# Altium PCB steve.PcbDoc (part 3 of 3)
Units mm, origin at the board's own origin, x right, y up, seen from the top; angles counter-clockwise.
Board outline 168.82 x 167.1 mm, 4 copper layers (Top Layer, Mid-Layer 1, Mid-Layer 2, Bottom Layer); 272 components, 254 nets, 1057 pads, 241 vias.
Unrouted connection lines stored in the file: 229.
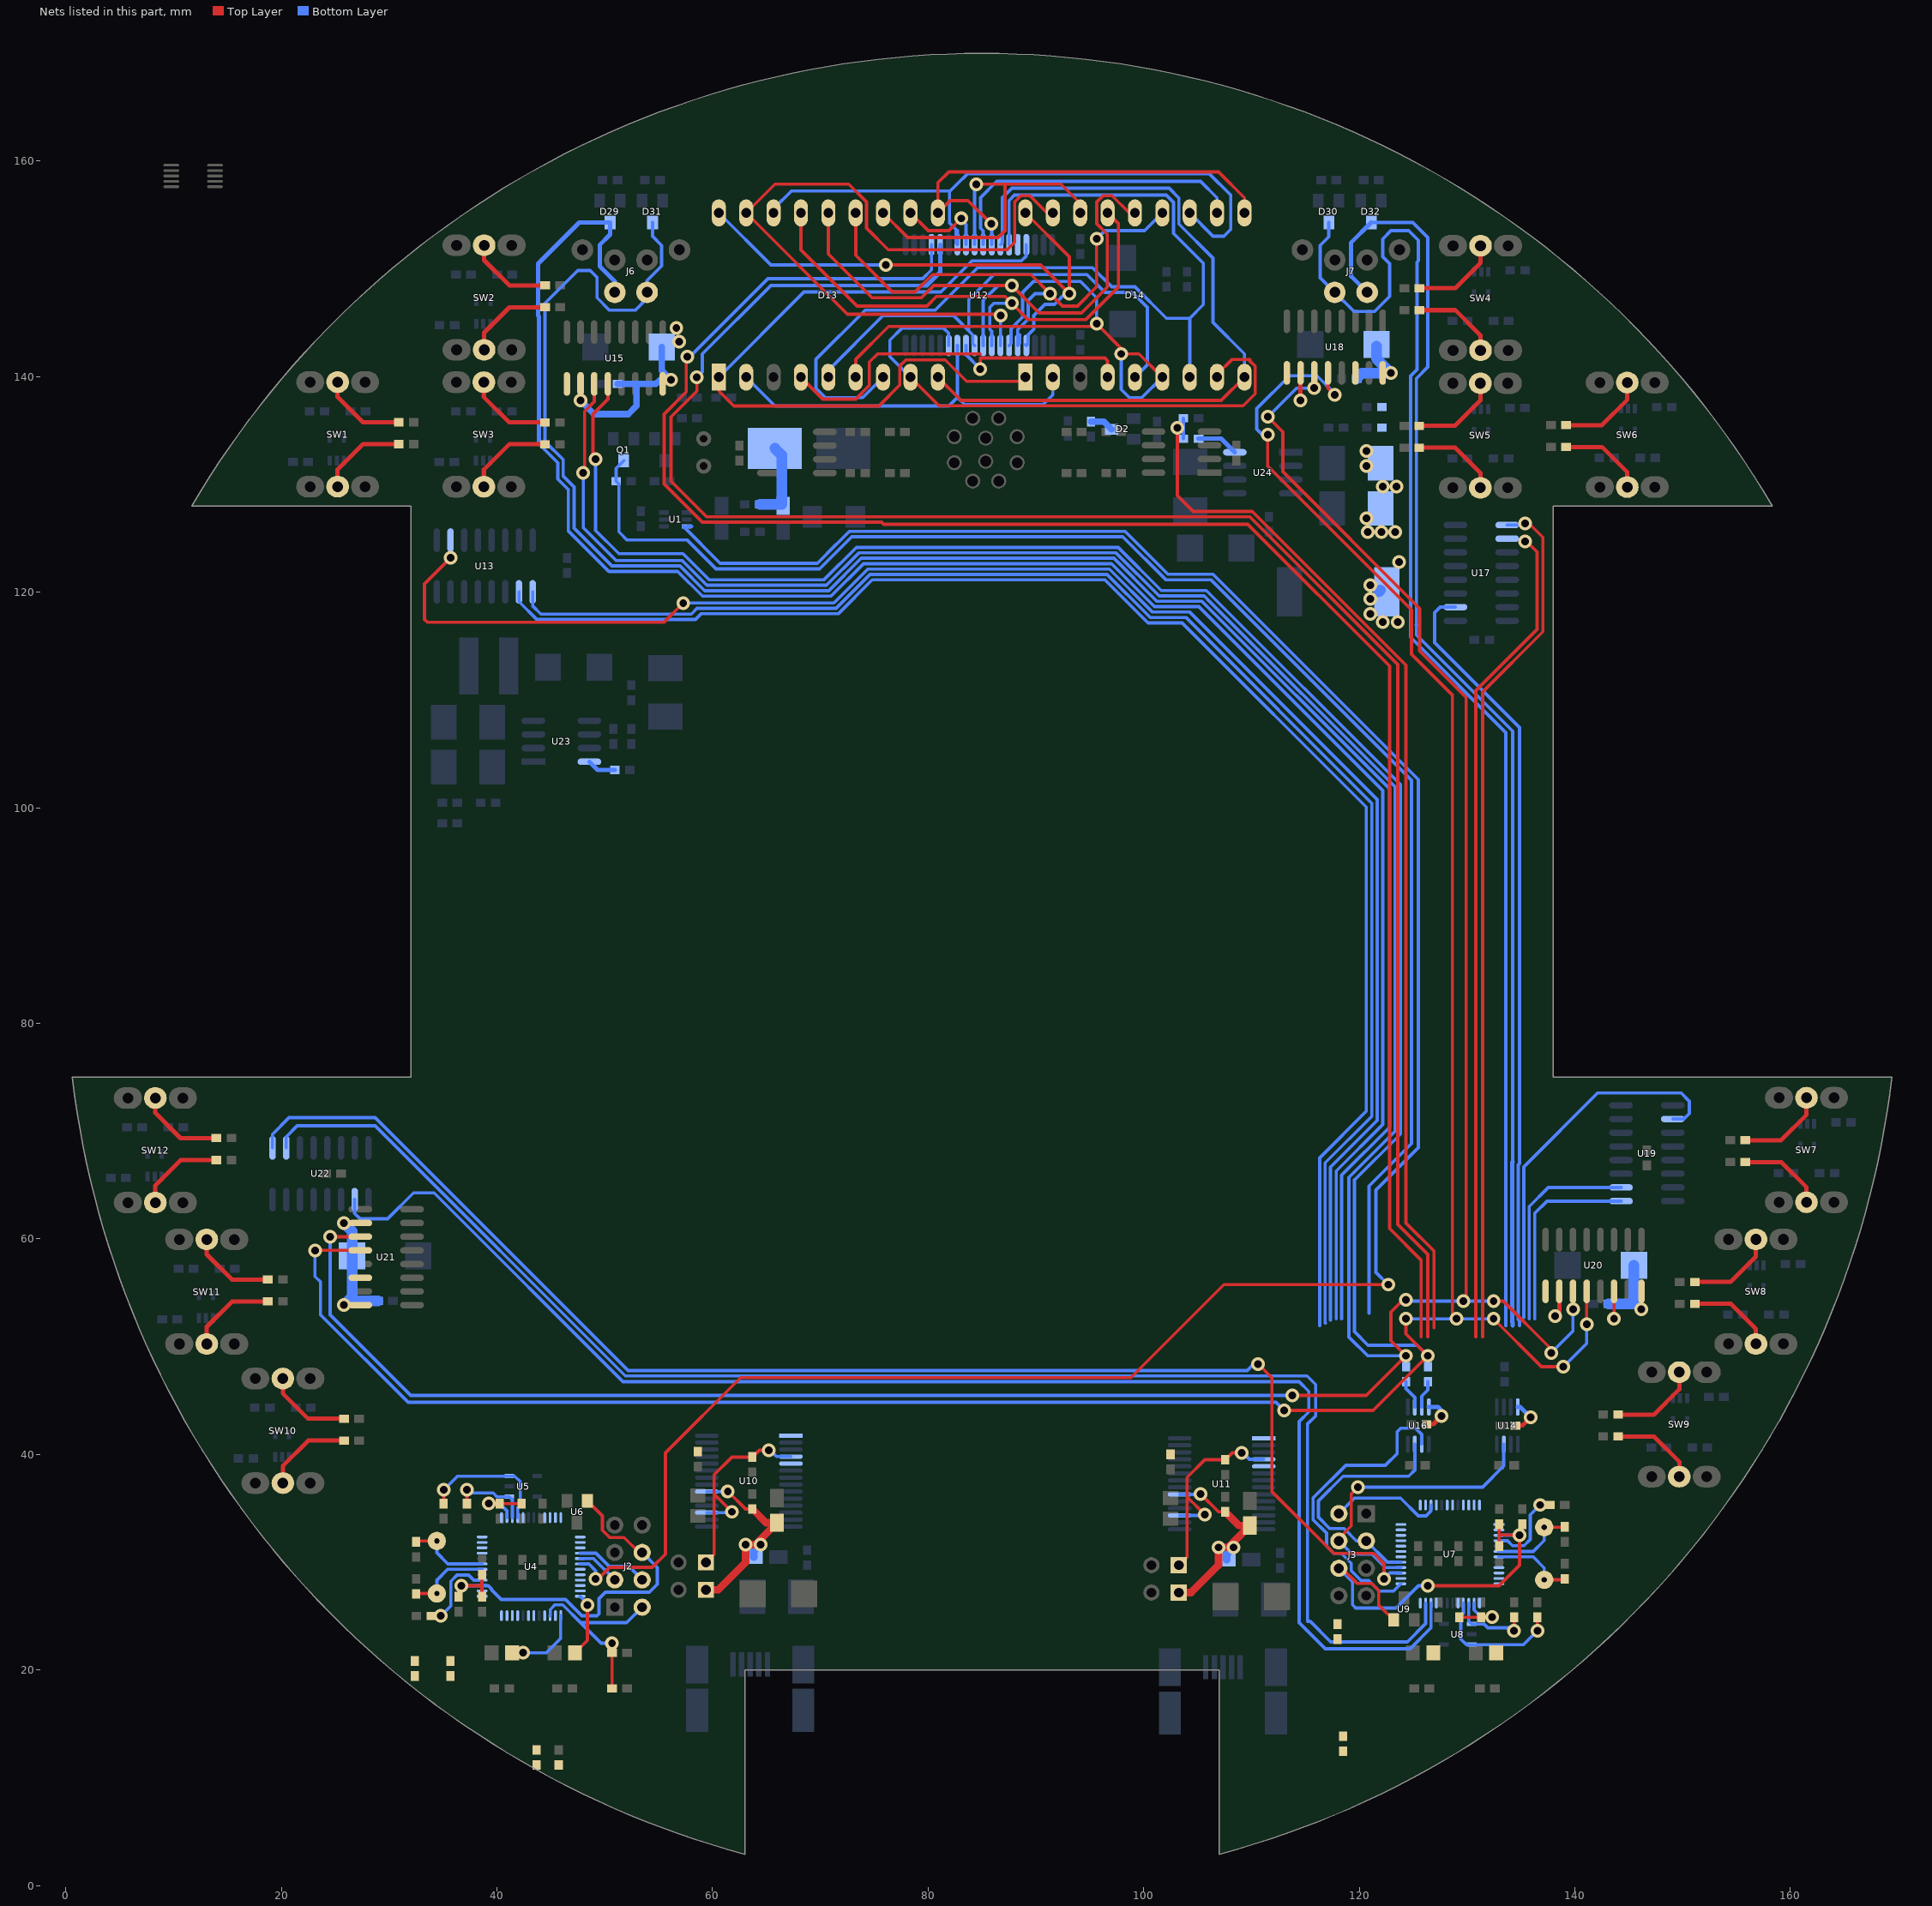
[diagram p5: the nets of this part, all layers, seen from the top]

## Via types
v1: diameter 1.27, hole 0.711, Top Layer to Bottom Layer, 241 vias

## Nets (pads, with @x,y where several pads share a name; then routed paths per layer and width w, separated by ;. In a path a pad name is that pad's centre, name@x,y a point inside that pad or via, vN(x,y) a via of type N, cw(c..) or ccw(c..) an arc to the next point about the centre after c; other vN are vias at no path point) (continued)
NetR48_1: R48.1 U15.12 U18.12 U20.12 U21.12 | length 412.6
  Top Layer w0.3: v1(23.114,58.928) U21.12@27.318,58.928 ; v1(49.149,132.334) 48.895,132.588 48.895,136.525 50.292,137.922 U15.12@50.292,139.332 ; v1(111.506,134.62) 111.506,131.699 124.841,118.364 124.841,114.238 128.651,110.428 128.651,52.959 v1(129.032,52.578) ; v1(113.03,44.069) 121.285,44.069 v1(126.365,49.149) 124.333,51.181 v1(124.333,52.578) ; U18.12@117.094,140.348 117.094,138.938 v1(117.729,138.303) ; v1(132.461,52.578) 136.906,48.133 v1@138.811,48.133 ; v1(141.097,52.07) U20.12@141.097,55.131
  Bottom Layer w0.3: v1(23.114,58.928) 23.114,56.515 23.622,56.007 23.622,52.959 31.75,44.831 112.268,44.831 v1(113.03,44.069) ; v1@49.149,132.08 49.149,125.73 51.308,123.571 57.247,123.571 59.66,121.158 70.354,121.158 73.345,124.149 97.645,124.149 101.636,120.158 105.813,120.158 123.825,102.146 123.825,69.723 119.598,65.496 119.543,65.496 119.543,51.399 120.808,50.134 125.38,50.134 v1(126.365,49.149) ; v1(111.506,134.62) 110.998,134.62 110.49,135.128 110.49,137.033 113.538,140.081 116.074,140.081 117.729,138.426 v1(117.729,138.303) ; v1(124.333,52.578) 127.127,52.578 v1(129.032,52.578) v1@132.334,52.578 ; v1(138.938,48.133) 141.097,50.292 v1(141.097,52.07)
NetR48_2: R48.2 U16.7 | length 2.6
  Bottom Layer w0.3: U16.7@125.801,44.397 125.801,45.41 126.365,45.974 R48.2@126.365,46.736
NetR49_1: R49.1 U15.11 U18.11 U20.11 U21.11 | length 400.1
  Top Layer w0.3: v1(24.511,60.198) U21.11@27.318,60.198 ; v1@48.006,131.318 48.133,131.445 48.133,136.779 49.022,137.668 U15.11@49.022,139.332 ; v1(111.506,136.271) 112.903,134.874 112.903,131.191 125.603,118.491 125.603,114.554 129.921,110.236 129.921,54.483 v1(129.667,54.229) ; v1(113.792,45.466) 120.65,45.466 v1(124.333,49.149) 122.936,50.546 122.936,53.213 124.079,54.356 v1(124.333,54.356) ; v1(132.461,54.229) 133.35,54.229 137.668,49.911 v1@137.668,49.53 ; v1(139.827,53.467) U20.11@139.827,55.131
  Bottom Layer w0.3: v1(24.511,60.198) 24.511,52.959 32.004,45.466 v1(113.792,45.466) ; v1(48.006,131.064) 48.006,125.984 51.054,122.936 57.175,122.936 59.461,120.65 70.565,120.65 73.563,123.649 97.438,123.649 101.429,119.658 105.606,119.658 106.155,119.109 ; 107.044,118.22 106.155,119.109 ; v1(111.506,136.271) 114.173,138.938 v1(115.824,138.938) ; v1@124.333,49.53 v1(124.333,49.149) 120.777,49.149 119.043,50.883 119.043,65.703 123.317,69.977 123.317,101.947 106.155,119.109 ; v1(124.333,54.356) 124.46,54.229 v1(129.667,54.229) v1(132.461,54.229) ; v1(137.795,49.403) 139.827,51.435 v1(139.827,53.467)
NetR49_2: R49.2 U16.6 | length 2.7
  Bottom Layer w0.3: R49.2@124.333,46.736 124.333,46.101 125.151,45.283 U16.6@125.151,44.397
NetR53_2: R53.2 SW1.6 | length 8.2
  Top Layer w0.4: SW1.6@25.215,129.793 25.214,131.386 27.566,133.738 R53.2@30.884,133.738
NetR54_2: R54.2 SW1.5 | length 8
  Top Layer w0.4: SW1.5@25.215,139.493 25.214,138.108 27.552,135.77 R54.2@30.884,135.77
NetR58_2: R58.2 SW2.6 | length 8.2
  Top Layer w0.4: SW2.6@38.804,142.493 38.803,144.086 41.155,146.438 R58.2@44.473,146.438
NetR59_2: R59.2 SW2.5 | length 8
  Top Layer w0.4: SW2.5@38.804,152.193 38.803,150.808 41.141,148.47 R59.2@44.473,148.47
NetR63_2: R63.2 SW3.6 | length 8.2
  Top Layer w0.4: SW3.6@38.781,129.787 38.78,131.379 41.132,133.731 R63.2@44.45,133.731
NetR64_2: R64.2 SW3.5 | length 8
  Top Layer w0.4: SW3.5@38.781,139.487 38.78,138.101 41.118,135.763 R64.2@44.45,135.763
NetR68_2: R68.2 SW4.6 | length 8.2
  Top Layer w0.4: R68.2@125.58,148.202 128.898,148.202 131.25,150.554 SW4.6@131.249,152.147
NetR69_2: R69.2 SW4.5 | length 8
  Top Layer w0.4: R69.2@125.58,146.17 128.912,146.17 131.25,143.832 SW4.5@131.249,142.447
NetR73_2: R73.2 SW5.6 | length 8.2
  Top Layer w0.4: R73.2@125.565,135.443 128.883,135.443 131.235,137.795 SW5.6@131.234,139.388
NetR74_2: R74.2 SW5.5 | length 8
  Top Layer w0.4: R74.2@125.565,133.411 128.897,133.411 131.235,131.073 SW5.5@131.234,129.688
NetR78_2: R78.2 SW6.6 | length 8.2
  Top Layer w0.4: R78.2@139.192,135.509 142.51,135.509 144.862,137.861 SW6.6@144.861,139.453
NetR79_2: R79.2 SW6.5 | length 8
  Top Layer w0.4: R79.2@139.192,133.477 142.524,133.477 144.862,131.139 SW6.5@144.861,129.753
NetR83_2: R83.2 SW7.6 | length 8.2
  Top Layer w0.4: R83.2@155.821,69.149 159.139,69.149 161.491,71.501 SW7.6@161.49,73.094
NetR84_2: R84.2 SW7.5 | length 8
  Top Layer w0.4: R84.2@155.821,67.117 159.153,67.117 161.491,64.779 SW7.5@161.49,63.394
NetR88_2: R88.2 SW8.6 | length 8.2
  Top Layer w0.4: R88.2@151.13,56.007 154.448,56.007 156.8,58.359 SW8.6@156.799,59.951
NetR89_2: R89.2 SW8.5 | length 8
  Top Layer w0.4: R89.2@151.13,53.975 154.462,53.975 156.8,51.637 SW8.5@156.799,50.251
NetR93_2: R93.2 SW9.6 | length 8.2
  Top Layer w0.4: R93.2@144.018,43.688 147.336,43.688 149.688,46.04 SW9.6@149.687,47.632
NetR94_2: R94.2 SW9.5 | length 8
  Top Layer w0.4: R94.2@144.018,41.656 147.35,41.656 149.688,39.318 SW9.5@149.687,37.932
NetR98_2: R98.2 SW10.6 | length 8.2
  Top Layer w0.4: SW10.6@20.135,37.337 20.134,38.93 22.486,41.282 R98.2@25.804,41.282
NetR99_2: R99.2 SW10.5 | length 8
  Top Layer w0.4: SW10.5@20.135,47.037 20.134,45.652 22.472,43.314 R99.2@25.804,43.314
NetR103_2: R103.2 SW11.6 | length 8.2
  Top Layer w0.4: SW11.6@13.071,50.244 13.07,51.837 15.422,54.188 R103.2@18.74,54.188
NetR104_2: R104.2 SW11.5 | length 8
  Top Layer w0.4: SW11.5@13.071,59.944 13.07,58.559 15.409,56.22 R104.2@18.74,56.22
NetR108_2: R108.2 SW12.6 | length 8.2
  Top Layer w0.4: SW12.6@8.301,63.366 8.3,64.958 10.652,67.31 R108.2@13.97,67.31
NetR109_2: R109.2 SW12.5 | length 8
  Top Layer w0.4: SW12.5@8.301,73.066 8.3,71.68 10.638,69.342 R109.2@13.97,69.342
NetR111_1: R111.1 U23.8 | length 2.7
  Bottom Layer w0.4: U23.8@48.574,104.267 49.336,103.505 R111.1@50.927,103.505
NetR115_1: R115.1 U24.8 | length 3.9
  Bottom Layer w0.4: R115.1@105.083,134.254 107.182,134.254 U24.8@108.452,132.984
NetU15_9: U15.9 U18.14
NetU18_9: U18.9 U20.14 | length 2.6
  Top Layer w0.3: v1(143.637,52.578) U20.14@143.637,55.131
NetU20_9: U20.9 U21.14
O0: D13.16 D14.12 U12.7 | length 59.9
  Bottom Layer w0.3: D13.16@65.659,155.194 65.659,155.575 67.31,157.226 81.978,157.226 81.978,157.162 ; D14.12@104.267,155.194 106.426,153.035 107.442,153.035 108.077,153.67 108.077,156.845 106.076,158.846 83.662,158.846 82.614,157.797 81.978,157.162 ; 81.978,157.162 81.978,154.273 82.581,153.67 ; 82.581,153.67 82.709,153.542 U12.7@82.709,152.249 82.581,152.377 82.581,153.67
O1: D13.11 U12.8 | length 7.7
  Top Layer w0.3: D13.11@78.359,155.194 80.01,153.543 81.915,153.543 v1(83.058,154.686)
  Bottom Layer w0.3: U12.8@83.509,152.249 83.509,154.121
O2: D13.12 D14.16 U12.9 | length 33.8
  Top Layer w0.3: D13.12@75.819,155.194 78.105,152.908 86.487,152.908 87.122,153.543 87.122,157.734 87.249,157.861 ; v1(84.455,157.861) 87.249,157.861 ; D14.16@94.107,155.194 94.107,156.083 92.329,157.861 87.249,157.861
  Bottom Layer w0.3: U12.9@84.309,152.249 84.309,157.715 v1(84.455,157.861)
O3: D14.11 U12.10 | length 29.1
  Bottom Layer w0.3: U12.10@85.109,152.249 85.109,153.528 84.867,153.77 84.867,156.622 86.36,158.115 105.283,158.115 106.807,156.591 D14.11@106.807,155.194
O4: D13.10 D14.10 U12.11 | length 42.3
  Top Layer w0.3: v1(85.852,154.178) 83.693,156.337 82.042,156.337 D13.10@80.899,155.194 80.899,157.988 81.915,159.004 106.934,159.004 109.347,156.591 D14.10@109.347,155.194
  Bottom Layer w0.3: v1(85.852,154.178) 85.909,154.121 U12.11@85.909,152.249
O5: D13.9 D14.9 U12.12 | length 70.9
  Top Layer w0.3: D13.9@80.899,139.954 83.058,137.795 107.188,137.795 D14.9@109.347,139.954
  Bottom Layer w0.3: U12.12@86.709,152.249 86.884,152.424 86.884,156.607 87.757,157.48 102.362,157.48 103.267,156.575 103.267,154.162 106.426,151.003 106.426,145.034 109.347,142.113 D14.9@109.347,139.954
O6: D13.7 D14.7 U12.13 | length 87.9
  Bottom Layer w0.3: D13.7@75.819,139.954 73.914,138.049 70.485,138.049 69.596,138.938 69.596,141.605 74.168,146.177 80.645,146.177 84.582,150.114 95.25,150.114 97.028,148.336 99.187,148.336 102.108,145.415 104.267,145.415 ; U12.13@87.509,152.249 87.509,156.343 88.011,156.845 102.09,156.845 102.767,156.168 102.767,153.289 105.537,150.519 105.537,146.685 104.267,145.415 ; D14.7@104.267,139.954 104.267,145.415
O7: U12.14
O8: D13.1 D14.1 U12.15 | length 68.3
  Top Layer w0.3: D13.1@60.579,139.954 60.579,138.684 61.976,137.287 75.438,137.287 77.359,139.208 77.359,140.968 77.945,141.554 81.585,141.554 83.566,139.573 88.646,139.573 D14.1@89.027,139.954
  Bottom Layer w0.3: D13.1@60.579,139.954 68.484,147.859 81.184,147.859 84.074,150.749 88.646,150.749 89.109,151.212 U12.15@89.109,152.249
O9: D13.18 D14.18 U12.22 | length 52.1
  Top Layer w0.3: v1(76.073,150.368) 90.424,150.368 v1(93.091,147.701) 93.091,151.13 D14.18@89.027,155.194
  Bottom Layer w0.3: D13.18@60.579,155.194 65.405,150.368 v1(76.073,150.368) ; U12.22@89.027,142.981 U12.22@89.109,142.899 89.284,143.074 89.284,143.883 89.65,144.249 89.789,144.388 89.789,145.669 90.836,146.716 91.721,146.716 92.706,147.701 v1(93.091,147.701)
O10: D13.13 D14.13 U12.23 | length 49.4
  Top Layer w0.3: D13.13@73.279,155.194 73.279,151.257 76.677,147.859 78.767,147.859 80.387,149.479 89.535,149.479 v1(91.313,147.701) 92.456,146.558 93.853,146.558 95.631,148.336 v1@95.631,152.4
  Bottom Layer w0.3: 88.484,143.883 88.484,143.074 U12.23@88.309,142.899 88.309,144.371 89.273,145.335 89.273,147.058 89.916,147.701 v1(91.313,147.701) ; v1(95.631,152.781) 96.393,153.543 100.076,153.543 D14.13@101.727,155.194
O11: D13.6 D14.6 U12.24 | length 59.1
  Top Layer w0.3: D13.6@73.279,139.954 73.279,141.605 76.327,144.653 v1@95.377,144.653 ; v1@97.663,142.113 v1(97.917,142.113) ; D14.6@101.727,139.954 99.568,142.113 v1(97.917,142.113) ; v1@95.377,144.653 95.631,144.653 v1(95.631,144.907) ; v1@95.377,144.653 v1(95.631,144.907) ; v1(95.631,144.907) 97.917,142.621 v1(97.917,142.113)
  Bottom Layer w0.3: U12.24@87.509,142.899 87.684,143.074 87.684,144.453 88.773,145.542 88.773,147.828 89.789,148.844 94.107,148.844 95.631,147.32 v1(95.631,144.907) ; v1@97.409,142.113 v1(97.917,142.113) 97.917,138.811 98.679,138.049 99.822,138.049 D14.6@101.727,139.954
O12: D13.17 D14.17 U12.25 | length 68.8
  Top Layer w0.3: v1(86.741,145.669) 86.614,145.796 86.233,145.796 72.517,145.796 D13.17@63.119,155.194 65.786,157.861 72.626,157.861 74.279,156.208 74.279,153.797 76.295,151.781 87.337,151.781 88.027,152.471 88.027,156.208 88.613,156.794 89.441,156.794 91.041,155.194 D14.17@91.567,155.194
  Bottom Layer w0.3: U12.25@86.709,142.899 86.709,145.637 v1(86.741,145.669)
O13: D13.15 D14.15 U12.26 | length 50.7
  Top Layer w0.3: D13.15@68.199,155.194 68.199,151.765 73.406,146.558 79.883,146.558 80.772,147.447 87.122,147.447 v1(87.757,146.812) 89.281,145.288 94.615,145.288 97.663,148.336 97.663,154.178 D14.15@96.647,155.194
  Bottom Layer w0.3: U12.26@85.909,142.899 85.909,144.215 85.725,144.399 85.725,146.431 86.106,146.812 v1(87.757,146.812)
O14: D13.14 D14.14 U12.27 | length 54
  Top Layer w0.3: D13.14@70.739,155.194 70.739,151.384 74.803,147.32 79.375,147.32 80.518,148.463 v1(87.757,148.463) 90.297,145.923 94.234,145.923 96.616,148.305 96.616,153.211 95.647,154.18 95.647,156.208 96.233,156.794 97.061,156.794 98.661,155.194 D14.14@99.187,155.194
  Bottom Layer w0.3: U12.27@85.109,142.899 85.109,147.085 86.487,148.463 v1(87.757,148.463)
O15: D13.5 D14.5 U12.28 | length 46.6
  Bottom Layer w0.3: D13.5@70.739,139.954 70.739,140.589 75.819,145.669 82.348,145.669 84.134,143.883 84.134,143.074 U12.28@84.309,142.899 ; 83.768,144.249 83.768,147.141 86.106,149.479 94.742,149.479 96.393,147.828 98.933,147.828 100.33,146.431 100.33,141.097 D14.5@99.187,139.954
O16: D13.4 D14.4 U12.29 | length 37.7
  Top Layer w0.3: D13.4@68.199,139.954 70.231,137.922 73.279,137.922 74.549,139.192 74.549,141.351 75.311,142.113 84.836,142.113 ; v1(84.836,140.716) 84.836,141.732 96.393,141.732 96.647,141.478 D14.4@96.647,139.954
  Bottom Layer w0.3: U12.29@83.509,142.899 83.509,142.043 v1(84.836,140.716)
O17: D13.2 D14.2 U12.30 | length 35.6
  Bottom Layer w0.3: D13.2@63.119,139.954 65.786,137.287 81.915,137.287 82.709,138.081 ; U12.30@82.709,142.899 82.709,138.081 ; 91.567,138.557 91.567,138.303 90.678,137.414 83.376,137.414 82.709,138.081
O18: D13.8 D14.8 U12.31 | length 52.3
  Top Layer w0.3: D13.8@78.359,139.954 81.018,137.295 109.228,137.295 110.347,138.414 110.347,140.968 109.855,141.46 109.855,141.605 108.204,141.605 106.807,140.208 D14.8@106.807,139.954
  Bottom Layer w0.3: D13.8@78.359,139.954 76.454,141.859 76.454,143.383 77.597,144.526 81.407,144.526 81.909,144.024 U12.31@81.909,142.899
"PIO 0.1/CLKOUT_U_lpc11c141": R21.2 U4.4 | length 6.9
  Bottom Layer w0.3: v1(34.798,25.019) 35.718,25.939 35.718,28.221 36.295,28.798 37.369,28.798 37.834,28.333 U4.4@38.621,28.333
"PIO 0.1/CLKOUT_U_lpc11c142": R28.2 U7.4 | length 6.9
  Bottom Layer w0.3: U7.4@132.956,31.992 133.743,31.992 134.208,31.527 135.282,31.527 135.859,32.104 135.859,34.386 v1(136.779,35.306)
"PIO 0.2/SSEL0_U_lpc11c141": U4.10
"PIO 0.2/SSEL0_U_lpc11c142": U7.10 U19.10 | length 19.7
  Bottom Layer w0.3: 135.763,52.578 135.763,62.992 137.541,64.77 U19.10@144.285,64.77
"PIO 0.3_U_lpc11c141": R18.1 R20.2 U4.14 | length 5.6
  Top Layer w0.3: v1(39.243,35.433) R18.1@40.259,35.433 R20.2@42.291,35.433
  Bottom Layer w0.3: v1(39.243,35.433) 40.259,35.433 40.921,34.771 U4.14@40.921,34.133
"PIO 0.3_U_lpc11c142": R25.1 R27.2 U7.14 | length 5.6
  Top Layer w0.3: R27.2@129.286,24.892 R25.1@131.318,24.892 v1(132.334,24.892)
  Bottom Layer w0.3: U7.14@130.656,26.192 130.656,25.554 131.318,24.892 v1(132.334,24.892)
"PIO 0.4/SCL_U_lpc11c141": R23.1 U4.15 U5.1 | length 7.5
  Top Layer w0.3: R23.1@37.211,35.433 v1(37.211,36.703)
  Bottom Layer w0.3: v1(37.211,36.703) 37.496,36.418 39.651,36.418 40.001,36.068 U5.1@41.148,36.068 41.421,35.795 U4.15@41.421,34.133
"PIO 0.4/SCL_U_lpc11c142": R30.1 U7.15 U8.1 U12.5 | length 186.3
  Top Layer w0.3: v1(58.547,139.954) 58.547,138.684 56.134,136.271 56.134,130.302 59.436,127 109.855,127 123.571,113.284 123.571,61.341 126.365,58.547 126.365,50.927 ; v1(134.366,23.622) R30.1@134.366,24.892
  Bottom Layer w0.3: v1(58.547,139.954) 59.055,140.462 59.055,142.113 65.405,148.463 79.375,148.463 ; U7.15@130.156,26.192 130.156,24.53 U8.1@130.429,24.257 131.576,24.257 131.926,23.907 134.081,23.907 v1(134.366,23.622)
  Bottom Layer w0.4: 79.375,148.463 79.883,148.463 81.109,149.689 U12.5@81.109,152.249
"PIO 0.5/SDA_U_lpc11c141": R24.1 U4.16 U5.3 | length 12.6
  Top Layer w0.3: R24.1@35.052,35.433 v1(35.052,36.703)
  Bottom Layer w0.3: v1(35.052,36.703) 36.327,37.978 U5.3@41.148,37.978 41.651,37.978 42.164,37.465 42.164,35.306 41.921,35.063 U4.16@41.921,34.133
"PIO 0.5/SDA_U_lpc11c142": R31.1 U7.16 U8.3 U12.4 | length 191.3
  Top Layer w0.3: v1(57.658,141.859) 57.562,141.763 57.562,138.588 55.505,136.531 55.505,130.042 59.055,126.492 75.692,126.492 75.882,126.301 ; 75.874,126.31 109.656,126.31 122.809,113.157 122.809,60.96 125.73,58.039 125.73,50.927 ; v1(136.525,23.622) R31.1@136.525,24.892
  Bottom Layer w0.3: v1(57.658,141.859) 57.903,141.859 65.142,149.098 79.502,149.098 80.309,149.905 U12.4@80.309,152.249 ; U7.16@129.656,26.192 129.656,25.262 129.413,25.019 129.413,22.86 129.926,22.347 U8.3@130.429,22.347 135.25,22.347 v1(136.525,23.622)
"PIO 0.6_U_lpc11c141": U4.22
"PIO 0.6_U_lpc11c142": U7.22 U22.2 | length 136.8
  Bottom Layer w0.3: U22.2@26.797,63.64 26.797,62.357 27.305,61.849 29.845,61.849 32.258,64.262 34.163,64.262 51.689,46.736 114.427,46.736 115.316,45.847 115.316,43.942 114.427,43.053 114.427,24.384 116.84,21.971 124.714,21.971 126.656,23.913 U7.22@126.656,26.192
"PIO 0.7_U_lpc11c141": U4.23
"PIO 0.7_U_lpc11c142": U7.23 U22.10 | length 143.5
  Bottom Layer w0.3: U22.10@20.447,68.44 20.447,69.469 21.463,70.485 28.702,70.485 51.912,47.275 115.158,47.275 115.951,46.482 115.951,43.561 115.189,42.799 115.189,24.511 115.443,24.511 117.348,22.606 124.46,22.606 126.156,24.302 U7.23@126.156,26.192
"PIO 0.8/MISO0_U_lpc11c141": U4.27
"PIO 0.8/MISO0_U_lpc11c142": U7.27 U22.9 | length 132.1
  Top Layer w0.3: v1(110.617,48.387) 111.887,47.117 111.887,36.563 117.634,30.816 121.33,30.816 122.301,29.845 v1(122.301,28.448)
  Bottom Layer w0.3: U22.9@19.177,68.44 19.177,69.723 20.701,71.247 28.702,71.247 52.174,47.775 109.601,47.775 110.213,48.387 v1(110.617,48.387) ; v1(122.301,28.448) 122.845,28.992 U7.27@123.856,28.992
"PIO 0.9/MOSI0_U_lpc11c141": J2.4 U4.28 | length 6.8
  Bottom Layer w0.3: U4.28@47.721,30.833 49.177,30.833 50.419,29.591 52.235,29.591 J2.4@53.467,28.359
"PIO 0.9/MOSI0_U_lpc11c142": J3.4 U7.28 U14.3 | length 28.9
  Top Layer w0.3: J3.4@118.11,31.966 118.11,32.206 119.26,33.356 119.26,36.329 v1(119.888,36.957)
  Bottom Layer w0.3: J3.4@118.11,31.966 119.342,30.734 121.158,30.734 122.4,29.492 U7.28@123.856,29.492 ; v1@119.888,37.084 120.015,36.957 131.441,36.957 133.406,38.922 U14.3@133.406,40.947
"PIO 0.10/SCK0_U_lpc11c141": J2.3 U4.29 | length 4
  Bottom Layer w0.3: U4.29@47.721,30.333 48.953,30.333 J2.3@50.927,28.359
"PIO 0.10/SCK0_U_lpc11c142": J3.3 U7.29 U16.3 | length 23.4
  Bottom Layer w0.3: U7.29@123.856,29.992 122.624,29.992 J3.3@120.65,31.966 119.736,31.966 118.586,33.116 117.252,33.116 116.205,34.163 116.205,35.687 118.491,37.973 124.587,37.973 125.151,38.537 U16.3@125.151,40.947
"PIO 0.11/ADC0_U_lpc11c141": U4.32
"PIO 0.11/ADC0_U_lpc11c142": D29.3 J6.3 U7.32 | length 180.5
  Bottom Layer w0.3: 43.9,133.757 45.649,132.009 45.649,130.5 46.609,129.54 46.609,125.714 50.387,121.936 56.761,121.936 59.063,119.634 70.986,119.634 74,122.649 97.024,122.649 100.8,118.872 101.014,118.658 105.116,118.658 122.174,101.6 122.174,70.612 117.856,66.294 117.856,52.578
  Bottom Layer w0.4: 43.9,133.757 43.9,145.584 43.815,145.669 43.815,150.495 47.625,154.305 D29.3@50.495,154.305 50.495,153.196 49.527,152.228 49.527,150.248 50.927,148.848 J6.3@50.927,147.828
"PIO 1.0/ADC1_U_lpc11c141": U4.33
"PIO 1.0/ADC1_U_lpc11c142": D31.3 J6.1 U7.33 | length 182.9
  Bottom Layer w0.3: D31.3@54.432,154.305 54.432,153.023 55.277,152.178 55.277,150.269 53.927,148.919 J6.1@53.927,147.828 53.927,147.272 52.832,146.177 50.419,146.177 49.276,147.32 49.276,149.225 48.641,149.86 47.498,149.86 44.45,146.812 44.45,133.985 46.149,132.286 46.149,130.762 47.159,129.752 47.159,125.942 50.665,122.436 56.968,122.436 59.262,120.142 70.775,120.142 73.782,123.149 97.231,123.149 100.999,119.38 101.221,119.158 105.398,119.158 122.809,101.747 122.809,70.358 118.356,65.905 118.356,52.586 118.364,52.578
"PIO 1.1/ADC2_U_lpc11c141": U4.34
"PIO 1.1/ADC2_U_lpc11c142": D30.3 J7.3 U7.34 | length 128
  Bottom Layer w0.3: D30.3@117.17,154.305 117.17,152.969 116.379,152.178 116.379,149.178 J7.3@117.729,147.828 119.507,146.05 121.412,146.05 122.809,147.447 122.809,150.495 122.174,151.13 122.174,152.781 122.936,153.543 124.587,153.543 125.476,152.654 125.476,150.749 125.357,150.63 125.357,140.66 124.757,140.06 124.757,115.815 133.604,106.968 133.604,51.943
"PIO 1.2/ADC3_U_lpc11c141": U4.35
"PIO 1.2/ADC3_U_lpc11c142": D32.3 J7.1 U7.35 | length 118.8
  Bottom Layer w0.3: D32.3@121.107,154.305 124.968,154.305 126.365,152.908 126.365,140.89 125.307,139.832 125.307,116.967 125.307,116.043 134.239,107.111 134.239,67.144
  Bottom Layer w0.4: J7.1@120.729,147.828 119.253,149.304 119.253,152.451 D32.3@121.107,154.305 ; 134.239,51.943 134.239,52.236 134.205,52.27 134.205,67.11 134.239,67.144
"PIO 1.3/ADC4_U_lpc11c141": J2.2 R32.1 R33.2 U4.39 | length 17.6
  Top Layer w0.3: R33.2@50.673,18.288 R32.1@50.673,21.59
  Bottom Layer w0.3: U4.39@44.921,25.033 44.941,25.053 44.941,25.602 45.374,26.035 46.101,26.035 47.752,24.384 ; v1(50.673,22.479) 49.657,22.479 47.752,24.384 ; J2.2@53.467,25.819 52.032,24.384 47.752,24.384
"PIO 1.3/ADC4_U_lpc11c142": J3.2 U7.39 | length 10.6
  Bottom Layer w0.3: J3.2@118.11,34.506 119.545,35.941 123.825,35.941 125.476,34.29 126.203,34.29 126.636,34.723 126.636,35.272 U7.39@126.656,35.292
"PIO 1.4/ADC5/WAKEUP_U_lpc11c141": U4.40
"PIO 1.4/ADC5/WAKEUP_U_lpc11c142": D2.3 R14.1 U7.40 | length 2.2
  Bottom Layer w0.6: R14.1@95.123,135.839 96.317,135.839 D2.3@97.028,135.128
"PIO 1.5_U_lpc11c141": U4.45
"PIO 1.5_U_lpc11c142": U7.45 U17.2 | length 71.7
  Bottom Layer w0.3: U17.2@128.918,118.618 127.508,118.618 127,118.11 127,115.316 134.874,107.442 134.874,67.001 134.755,66.882 134.755,52.498 134.874,52.379 134.874,51.943
"PIO 1.6/RX_U_lpc11c141": U4.46 U10.1
"PIO 1.6/RX_U_lpc11c142": U7.46 U11.1
"PIO 1.7/TX_U_lpc11c141": U4.47 U10.5
"PIO 1.7/TX_U_lpc11c142": U7.47 U11.5
"PIO 1.8_U_lpc11c141": U4.9
"PIO 1.8_U_lpc11c142": U7.9 U17.9 | length 80.4
  Top Layer w0.3: 131.445,50.927 131.445,110.744 137.033,116.332 137.033,125.095 135.763,126.365 v1(135.382,126.365)
  Bottom Layer w0.3: U17.9@133.718,126.238 135.255,126.238 v1(135.382,126.365)
"PIO 1.9_U_lpc11c141": U4.17
"PIO 1.9_U_lpc11c142": U7.17 U17.10 | length 76.9
  Top Layer w0.3: 130.81,50.927 130.81,110.871 136.494,116.555 136.494,123.729 v1@135.255,124.968
  other v1: 135.382,124.714
"PIO 1.10/ADC6_U_lpc11c141": U1.6 U4.30 | length 223
  Top Layer w0.3: v1(49.149,28.448) 49.39,28.448 50.451,29.509 54.401,29.509 55.626,30.734 55.626,40.132 62.611,47.117 98.806,47.117 107.442,55.753 v1(122.682,55.753)
  Bottom Layer w0.3: U4.30@47.721,29.833 48.526,29.833 49.149,29.21 v1(49.149,28.448) ; U1.6@57.292,126.096 60.706,122.682 69.723,122.682 71.501,124.46 71.512,124.46 72.701,125.649 98.266,125.649 102.249,121.666 106.426,121.666 107.315,120.777 ; U1.6@57.599,126.096 58.054,126.096 ; v1(122.682,55.753) 121.539,56.896 121.539,64.516 125.476,68.453 125.476,102.616 107.632,120.46 ; 107.315,120.777 107.632,120.46 ; 107.315,120.777 107.632,120.46
"PIO 1.10/ADC6_U_lpc11c142": U7.30
"PIO 1.11/ADC7_U_lpc11c141": U4.42
"PIO 1.11/ADC7_U_lpc11c142": U7.42 U19.2 | length 35.4
  Bottom Layer w0.3: 135.255,52.705 135.255,66.675 142.113,73.533 149.86,73.533 150.622,72.771 150.622,71.628 150.114,71.12 U19.2@149.085,71.12
"PIO 2.0/SSEL1_U_lpc11c141": R37.2 U4.2
"PIO 2.0/SSEL1_U_lpc11c142": R36.1 R37.1 U7.2
"PIO 2.1/SCK1_U_lpc11c141": R38.2 U4.13
"PIO 2.1/SCK1_U_lpc11c142": R38.1 U7.13
"PIO 2.2/MISO1_U_lpc11c141": R42.1 U4.26
"PIO 2.2/MISO1_U_lpc11c142": R42.2 U7.26
"PIO 2.3/MOSI1_U_lpc11c141": R39.2 U4.38
"PIO 2.3/MOSI1_U_lpc11c142": R39.1 U7.38
"PIO 2.5_U_lpc11c141": U4.21
"PIO 2.5_U_lpc11c142": U7.21 U19.9 | length 18.3
  Bottom Layer w0.3: 136.271,52.578 136.271,62.357 137.414,63.5 U19.9@144.285,63.5
"PIO 2.6_U_lpc11c141": U4.1
"PIO 2.6_U_lpc11c142": U7.1 U13.2 | length 156.2
  Top Layer w0.3: v1(35.687,123.19) 33.274,120.777 33.274,117.475 33.528,117.221 55.499,117.221 v1(57.277,118.999)
  Bottom Layer w0.3: v1(57.277,118.999) 71.249,118.999 74.398,122.149 96.817,122.149 100.807,118.158 104.267,118.158 121.666,100.759 121.666,70.993 117.332,66.659 117.332,52.467
"PIO 2.7_U_lpc11c141": U4.11
"PIO 2.7_U_lpc11c142": U7.11 U13.9 | length 140.1
  Bottom Layer w0.3: U13.9@43.307,120.028 43.307,118.745 44.077,117.975 58.031,117.975 58.555,118.499 71.456,118.499 74.605,121.649 96.609,121.649 100.357,117.901 ; 100.557,117.702 100.357,117.901 ; 116.84,52.197 116.832,52.205 116.832,67.048 121.158,71.374 121.158,100.413 103.913,117.658 100.6,117.658 100.357,117.901
"PIO 2.8_U_lpc11c141": U4.12
"PIO 2.8_U_lpc11c142": U7.12 U13.10 | length 140.4
  Bottom Layer w0.3: U13.10@42.037,120.028 42.037,119.126 43.688,117.475 58.404,117.475 58.928,117.999 71.663,117.999 74.812,121.149 96.402,121.149 100.393,117.158 103.56,117.158 120.65,100.068 120.65,71.833 116.332,67.515 116.332,51.943
"PIO 2.9_U_lpc11c141": U4.24
"PIO 2.9_U_lpc11c142": Q1.3 R13.1 U7.24 | length 143.6
  Bottom Layer w0.3: Q1.3@51.765,132.207 51.054,131.496 R13.1@51.054,130.302 51.308,130.048 51.308,125.603 52.07,124.841 57.658,124.841 60.325,122.174 69.933,122.174 72.908,125.149 98.059,125.149 102.05,121.158 106.227,121.158 124.841,102.544 124.841,68.834 120.904,64.897 120.904,53.086
"PIO 2.10_U_lpc11c141": U4.25
"PIO 2.10_U_lpc11c142": U7.25 U16.2 | length 29.4
  Bottom Layer w0.3: U7.25@123.856,27.992 123.169,27.305 121.857,27.305 120.886,28.276 120.174,28.276 119.26,29.19 119.26,29.902 118.346,30.816 117.634,30.816 116.96,31.49 116.96,32.701 115.705,33.956 115.705,35.949 118.745,38.989 122.428,38.989 123.507,40.069 123.507,42.1 123.825,42.418 125.222,42.418 125.801,41.839 U16.2@125.801,40.947
"PIO 2.11_U_lpc11c141": U4.31
"PIO 2.11_U_lpc11c142": R43.1 U7.31
"PIO 3.0_U_lpc11c141": D6.K U4.36 | length 6
  Top Layer w0.3: D6.K@47.239,21.59 48.387,22.738 v1(48.387,26.035)
  Bottom Layer w0.3: U4.36@47.721,26.833 48.387,26.167 v1(48.387,26.035)
"PIO 3.0_U_lpc11c142": D8.K U7.36
"PIO 3.1_U_lpc11c141": D5.K U4.37 | length 6.2
  Bottom Layer w0.3: v1(42.418,21.59) 44.577,21.59 45.901,22.914 45.901,25.013 U4.37@45.921,25.033
"PIO 3.1_U_lpc11c142": D7.K U7.37
"PIO 3.2_U_lpc11c141": U4.43
"PIO 3.2_U_lpc11c142": U7.43
"PIO 3.3_U_lpc11c141": U4.48
"PIO 3.3_U_lpc11c142": U7.48
R\E\S\E\T\_U_lpc11c141: C14.1 J2.6 R19.2 R22.1 U4.3 U6.1 | length 37.8
  Top Layer w0.3: R19.2@36.449,26.797 36.449,27.559 v1(36.703,27.813) 37.338,27.813 37.34,27.811 38.608,27.811 ; C14.1@38.608,26.797 38.608,27.811 ; R22.1@38.608,28.826 38.608,27.811 ; U6.1@48.387,35.687 49.777,34.297 49.777,32.963 50.451,32.289 51.785,32.289 53.175,30.899 J2.6@53.467,30.899
  Bottom Layer w0.3: v1(36.703,27.813) 38.601,27.813 U4.3@38.621,27.833 38.641,27.813 39.189,27.813 39.471,27.532 39.471,27.462 40.398,26.535 46.363,26.535 47.879,25.019 49.276,25.019 49.466,25.209 49.466,26.607 50.069,27.209 54.133,27.209 54.864,27.94 54.864,29.502 J2.6@53.467,30.899
R\E\S\E\T\_U_lpc11c142: C22.1 J3.6 R26.2 R29.1 U7.3 U9.1 | length 38.8
  Top Layer w0.3: J3.6@118.11,29.426 118.402,29.426 119.792,28.036 121.126,28.036 121.8,27.362 121.8,26.028 U9.1@123.19,24.638 ; v1(126.365,27.813) 132.969,27.813 134.874,29.718 v1(134.874,32.512) ; R29.1@132.969,31.499 132.969,32.514 ; C22.1@132.969,33.528 132.969,32.514 ; R26.2@135.128,33.528 135.128,32.766 v1(134.874,32.512) ; 132.969,32.514 134.237,32.514 134.239,32.512 v1(134.874,32.512)
  Bottom Layer w0.3: J3.6@118.11,29.426 119.38,28.156 119.38,26.035 119.679,25.736 123.399,25.736 125.476,27.813 v1(126.365,27.813) ; U7.3@132.936,32.512 U7.3@132.956,32.492 132.976,32.512 v1(134.874,32.512)
USB3V3: C24.1 C28.1 P1.1 P3.1 R44.2 R45.2 U10.4 U10.17 U11.4 U11.17 | length 42.9
  Top Layer w0.3: P1.1@59.381,29.972 60.143,30.734 60.143,36.322 ; v1(61.794,34.671) 60.143,36.322 ; v1@65.35,40.386 64.334,40.386 C24.1@63.699,39.751 61.794,39.751 60.143,38.1 60.143,36.322 ; P3.1@103.251,29.718 104.013,30.48 104.013,36.068 ; v1(105.664,34.417) 104.013,36.068 ; v1@109.22,40.132 108.204,40.132 C28.1@107.569,39.497 105.664,39.497 104.013,37.846 104.013,36.068
  Bottom Layer w0.3: U10.17@59.465,34.595 61.718,34.595 v1(61.794,34.671) ; v1@65.35,40.386 65.941,39.795 U10.4@67.265,39.795 ; U11.17@103.335,34.341 105.588,34.341 v1(105.664,34.417) ; v1@109.22,40.132 109.811,39.541 U11.4@111.135,39.541
  other v1: 109.093,40.132 65.223,40.386
USB5V: C25.2 C27.1 C29.2 C31.1 L1.2 L2.2 P2.1 P4.1 U10.20 U11.20 | length 38.8
  Top Layer w0.3: v1(61.413,36.576) 63.064,34.925 C27.1@63.699,34.925 ; v1(105.283,36.322) 106.934,34.671 C31.1@107.569,34.671
  Top Layer w0.7: P2.1@59.381,27.432 60.524,27.432 63.064,29.972 v1(63.064,31.623) 63.953,31.623 C25.2@65.985,33.655 64.969,33.655 C27.1@63.699,34.925 ; P4.1@103.251,27.178 104.394,27.178 106.934,29.718 v1(106.934,31.369) 107.823,31.369 C29.2@109.855,33.401 108.839,33.401 C31.1@107.569,34.671
  Bottom Layer w0.3: U10.20@59.465,36.545 v1@61.509,36.545 ; U11.20@103.335,36.291 v1@105.379,36.291
  Bottom Layer w0.7: L1.2@63.826,30.48 63.826,30.988 v1(64.461,31.623) ; L2.2@107.696,30.226 107.696,30.734 v1(108.331,31.369)
VFUSED: F1.2 R6.2 R9.2 | length 7.7
  Bottom Layer w0.6: R9.2@66.421,128.143 R9.2@66.548,128.016
  Bottom Layer w1: R6.2@64.389,128.143 66.421,128.143 66.421,132.705 F1.2@65.776,133.35
VLED: C36.1 C37.1 C38.1 C39.1 C40.1 C41.1 C42.1 C43.1 C44.1 C45.1 C58.1 C59.1 C60.1 L4.2 R114.1 U14.8 U15.10 U15.16 U16.8 U18.10 U18.16 U20.10 U20.16 U21.10@27.318,61.468 U21.16 | length 53
  Top Layer w0.4: v1(114.554,137.795) U18.10@114.554,140.348 ; C40.1@126.238,42.799 126.873,42.799 v1(127.635,43.561) ; C41.1@134.493,42.672 135.128,42.672 v1(135.89,43.434) ; v1(138.176,52.832) 138.557,53.213 U20.10@138.557,55.131
  Bottom Layer w0.4: U16.8@126.451,44.397 127.307,44.397 127.635,44.069 v1(127.635,43.561) ; U14.8@134.706,44.397 134.927,44.397 v1(135.89,43.434)
  Bottom Layer w0.6: v1(47.752,137.795) 49.022,136.525 52.197,136.525 52.959,137.287 52.959,139.319 ; C45.1@51.181,139.319 52.959,139.319 ; C39.1@55.281,142.748 55.281,140.553 v1(56.134,139.7) 55.118,139.7 54.737,139.319 52.959,139.319
  Bottom Layer w1: v1(25.781,53.848) v1@26.162,54.229 ; v1(25.781,61.468) 26.552,60.697 C36.1@26.552,58.42 26.552,54.619 v1@26.162,54.229 ; C42.1@28.956,54.229 v1@26.162,54.229 ; C44.1@119.761,139.827 120.269,140.335 v1(122.936,140.335) 121.602,141.669 C38.1@121.602,142.812 ; L4.2@121.8,120.03 L4.2@121.974,120.204 ; C43.1@143.129,53.975 145.669,53.975 ; C37.1@145.478,57.531 145.478,54.166 145.669,53.975 ; v1(146.177,53.467) 145.669,53.975
  other v1: 122.174,117.221 123.571,117.221 121.031,117.983 121.031,119.38 121.031,120.65 123.698,122.809 120.777,125.603 122.047,125.603 123.317,125.603 120.65,126.873 122.174,129.794 123.444,129.794 120.65,131.699 120.65,133.096 56.896,143.256 56.642,144.526
VLED_EN: R1.2 R43.2 R115.2 | length 98.5
  Top Layer w0.3: v1(103.124,135.255) 103.124,128.96 104.584,127.5 110.062,127.5 124.333,113.229 124.333,61.468 126.936,58.864 126.936,51.752
  Bottom Layer w0.3: R115.2@103.686,134.254 R1.2@103.686,136.144
XTALIN_U_lpc11c141: C15.1 U4.6 Y1.1 | length 7.8
  Top Layer w0.3: C15.1@32.512,27.048 32.551,27.087 Y1.1@34.417,27.087 Y1.1@34.453,27.051
  Bottom Layer w0.3: Y1.1@34.417,27.087 34.417,28.321 35.429,29.333 U4.6@38.621,29.333
XTALIN_U_lpc11c142: C23.1 U7.6 Y2.1 | length 7.8
  Top Layer w0.3: Y2.1@137.124,33.274 Y2.1@137.16,33.238 139.026,33.238 C23.1@139.065,33.277
  Bottom Layer w0.3: U7.6@132.956,30.992 136.148,30.992 137.16,32.004 Y2.1@137.16,33.238
XTALOUT_U_lpc11c141: C12.1 U4.7 Y1.2 | length 7.8
  Top Layer w0.3: C12.1@32.512,31.877 32.602,31.967 Y1.2@34.417,31.967 Y1.2@34.507,31.877
  Bottom Layer w0.3: Y1.2@34.417,31.967 34.417,30.861 35.445,29.833 U4.7@38.621,29.833
XTALOUT_U_lpc11c142: C20.1 U7.7 Y2.2 | length 7.8
  Top Layer w0.3: Y2.2@137.07,28.448 Y2.2@137.16,28.358 138.975,28.358 C20.1@139.065,28.448
  Bottom Layer w0.3: U7.7@132.956,30.492 136.132,30.492 137.16,29.464 Y2.2@137.16,28.358
pads on no net: D13.3 D14.3 D15.1 D16.1 D17.1 D18.1 D19.1 D20.1 D21.1 D22.1 D23.1 D24.1 D25.1 D26.1 J1.3 J2.5 J2.7 J3.5 J3.7 J4.2@63.487,13.452 J4.4 J4.6 J5.2@107.357,13.198 J5.4 J5.6 J6.0 J7.0 SW1.4 SW2.4 SW3.4 SW4.4 SW5.4 SW6.4 SW7.4 SW8.4 SW9.4 SW10.4 SW11.4 SW12.4 U10.6 U10.8 U10.9 U10.10 U10.11 U10.13 U10.14 U10.19 U10.22 U10.23 U10.24 U10.27 U10.28 U11.6 U11.8 U11.9 U11.10 U11.11 U11.13 U11.14 U11.19 U11.22 U11.23 U11.24 U11.27 U11.28 U12.32 U12.33 U13.1 U13.13 U14.7 U15.6 U15.7 U17.1 U17.13 U18.6 U18.7 U19.1 U19.13 U20.6 U20.7 U21.1@9.786,159.623 U21.2@9.786,159.123 U21.3@9.786,158.623 U21.4@9.786,158.123 U21.5@9.786,157.623 U21.6 U21.7 U21.8@13.836,158.623 U21.9 U21.10@13.836,159.623 U22.1 U22.13 U23.2 U23.3 U24.2 U24.3

## Polygon pours and split planes (outlines as drawn)
NetD28_K on Bottom Layer "Bottom Layer-No Net" (solid, pour order 2): 107.315,124.714 114.3,124.714 114.3,122.844 114.3,122.301 106.68,122.301 106.892,122.301 106.892,124.714
GND on Bottom Layer "Bottom Layer-No Net" (solid, pour order 2): 111.675,126.111 119.126,126.111 119.126,125.324 119.126,125.095 110.998,125.095 111.224,125.095 111.224,126.111
NetD28_K on Bottom Layer "Bottom Layer-No Net" (solid, pour order 2): 110.109,129.159 110.109,122.174 107.6,122.174 106.87,122.174 106.87,129.794 106.87,129.582 110.109,129.582
GND on Bottom Layer "Bottom Layer-No Net" (solid, pour order 2): 112.829,129.622 116.205,129.622 116.205,127.492 116.205,126.873 112.522,126.873 112.624,126.873 112.624,129.622
VLED on Bottom Layer "Bottom Layer-No Net" (solid, pour order 2): 123.571,133.191 123.571,115.316 120.718,115.316 119.888,115.316 119.888,134.816 119.888,134.274 123.571,134.274
GND on Bottom Layer "Bottom Layer-No Net" (solid, pour order 2): 41.338,99.441 39.243,99.441 39.243,107.51 39.243,109.855 41.529,109.855 41.465,109.855 41.465,99.441
3V3 on Bottom Layer "Bottom Layer-No Net" (solid, pour order 2): 37.465,101.854 33.274,101.854 33.274,112.973 33.274,116.205 37.846,116.205 37.719,116.205 37.719,101.854
GND on Bottom Layer "Bottom Layer-No Net" (solid, pour order 2): 57.055,110.871 47.625,110.871 47.625,114.118 47.625,115.062 57.912,115.062 57.626,115.062 57.626,110.871
3V3 on Bottom Layer "Bottom Layer-No Net" (solid, pour order 2): 35.369,97.79 33.274,97.79 33.274,102.415 33.274,103.759 35.56,103.759 35.496,103.759 35.496,97.79
GND on Bottom Layer "Bottom Layer-No Net" (solid, pour order 2): 102.584,129.413 106.426,129.413 106.426,124.1 106.426,122.555 102.235,122.555 102.351,122.555 102.351,129.413
VLED on Bottom Layer "Bottom Layer-No Net" (solid, pour order 2): 123.937,136.572 123.937,115.385 121.969,115.385 121.397,115.385 121.397,138.499 121.397,137.856 123.937,137.856
GND on Bottom Layer "Bottom Layer-No Net" (solid, pour order 2): 119.462,133.71 119.462,125.095 116.215,125.095 115.271,125.095 115.271,134.493 115.271,134.232 119.462,134.232
GND on Bottom Layer "Bottom Layer-No Net" (solid, pour order 2): 117.811,135.492 117.811,125.364 116.63,125.364 116.287,125.364 116.287,136.413 116.287,136.106 117.811,136.106
NetD28_K on Bottom Layer "Bottom Layer-No Net" (solid, pour order 2): 115.062,124.206 115.062,117.221 112.405,117.221 111.633,117.221 111.633,124.841 111.633,124.629 115.062,124.629
GND on Mid-Layer 2 "Mid-Layer-2-No Net" (solid, remove dead copper, shelved, pour order 18): -0.381,0.508 -0.381,170.561 172.212,170.561 169.672,170.561 169.672,1.143 169.672,0.508 -0.381,0.508
3V3 on Mid-Layer 1 "Bottom Layer-No Net" (solid, remove dead copper, shelved, pour order 18): -0.381,0.508 -0.381,170.561 172.212,170.561 169.672,170.561 169.672,1.143 169.672,0.508 -0.381,0.508

## Keep-outs
Keep-Out Layer:
  circle w0.254: c85.127,85 r35
  lines w0.254: 0.592,75 32,75 ; 0.719,74.988 ccw(c85.127,85) 63.119,2.899 ; 11.818,128 32.127,128 32.127,75 ; 11.818,128.021 cw(c85.127,85) 158.436,128.021 ; 63.127,2.899 63.127,20 107.127,20 107.127,2.902 ; 107.148,2.902 ccw(c85.127,85) 169.536,74.994 138.127,74.994 ; 138.127,75 138.127,128 158.436,128

## Other copper
Top Layer:
  text "no top-side components  in that triangular area  in the centre" at 51.435,88.138 h1

## Silkscreen, mask and mechanical layers (free items; w line width, h text height)
Top Overlay:
  circle w0.254: c85,85 r35
  lines w0.254: 0.592,74.988 ccw(c85,85) 62.992,2.899 ; 11.691,128 32,128 32,75 63,20 ; 11.691,128.021 cw(c85,85) 158.309,128.021 ; 31.877,128 138,128 138,75 107,20 ; 63,2.899 63,20 ; 107,2.902 107,20 ; 107.021,2.902 ccw(c85,85) 169.409,74.994 ; 137.929,128 158.238,128 ; 63,20 107,20
  text "Brake" at 55.626,128.778 h1.52
Mechanical 4:
  circle w0.254: c85.127,85 r35
  lines w0.254: 0.592,75 32,75 ; 0.719,74.988 ccw(c85.127,85) 63.119,2.899 ; 11.818,128 32.127,128 32.127,75 63.127,20 ; 11.818,128.021 cw(c85.127,85) 158.436,128.021 ; 32.004,128 138.127,128 ; 63.127,2.899 63.127,20 ; 107.127,2.902 107.127,20 ; 107.148,2.902 ccw(c85.127,85) 169.536,74.994 138.127,74.994 ; 158.436,128 138.127,128 ; 63.127,20 107.127,20 ; 107.127,20 138.127,75 138.127,128